# EAGLE board CrackberryPi_1.0.5_test2 (EAGLE 7.2.0)
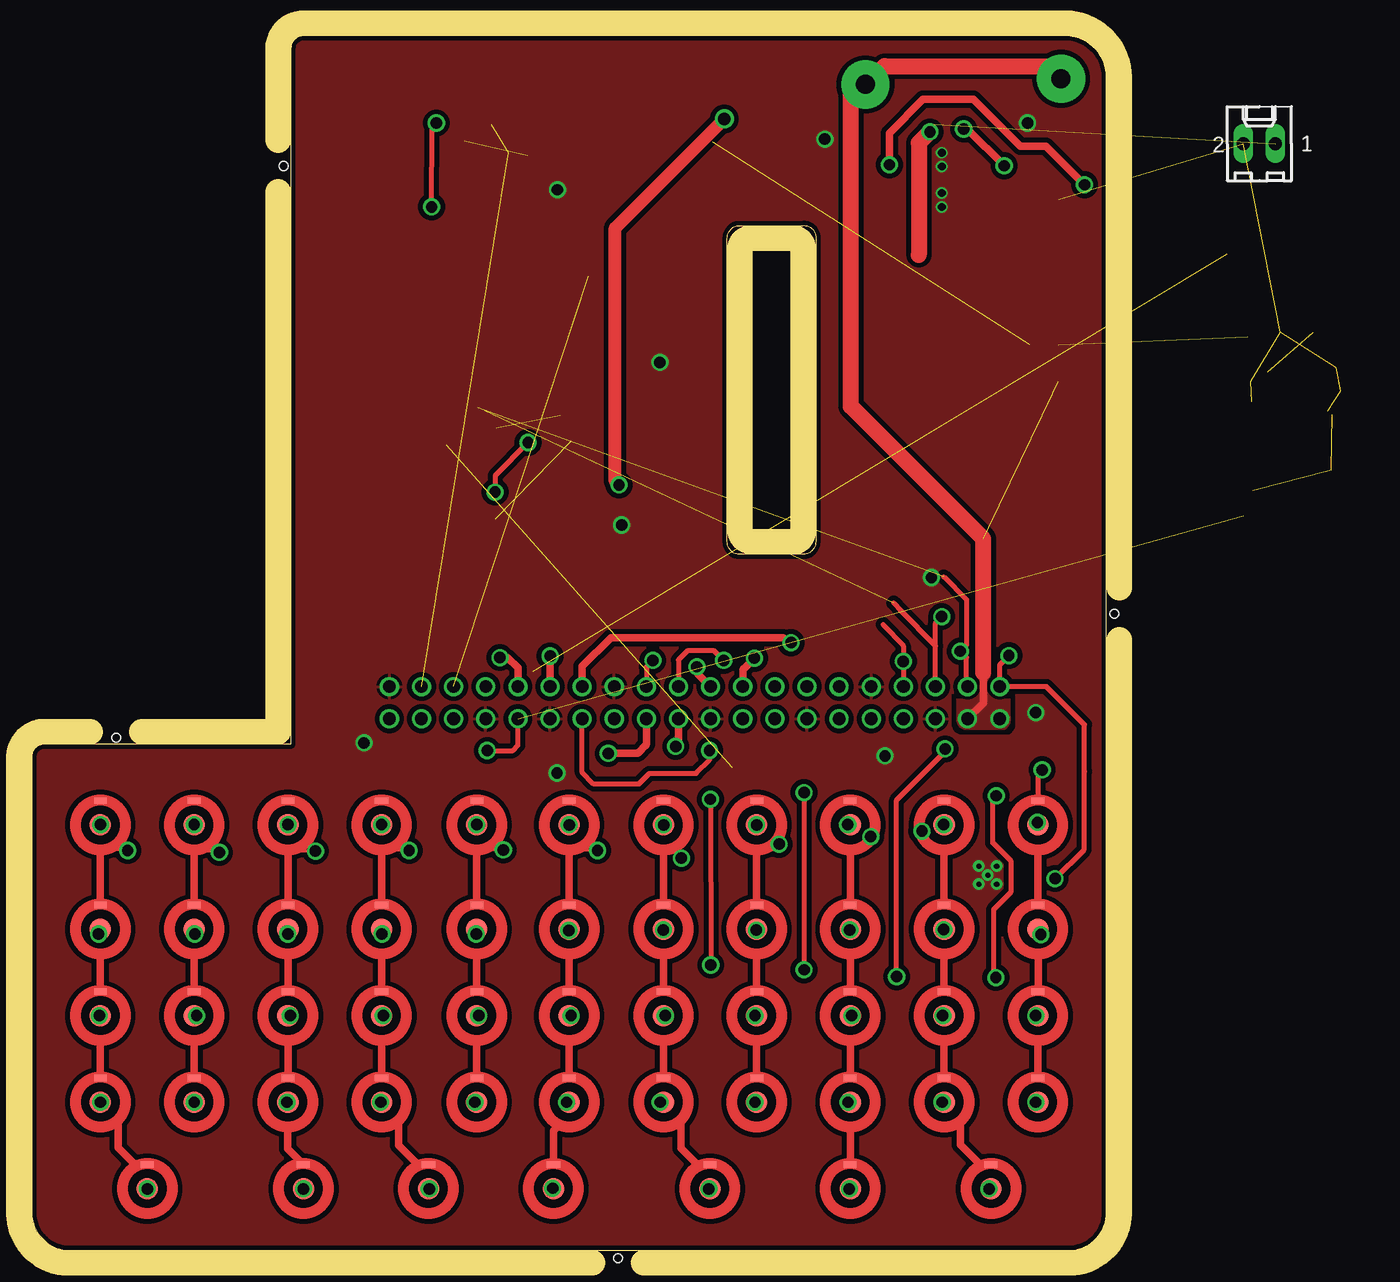
[diagram p0: board, top side]
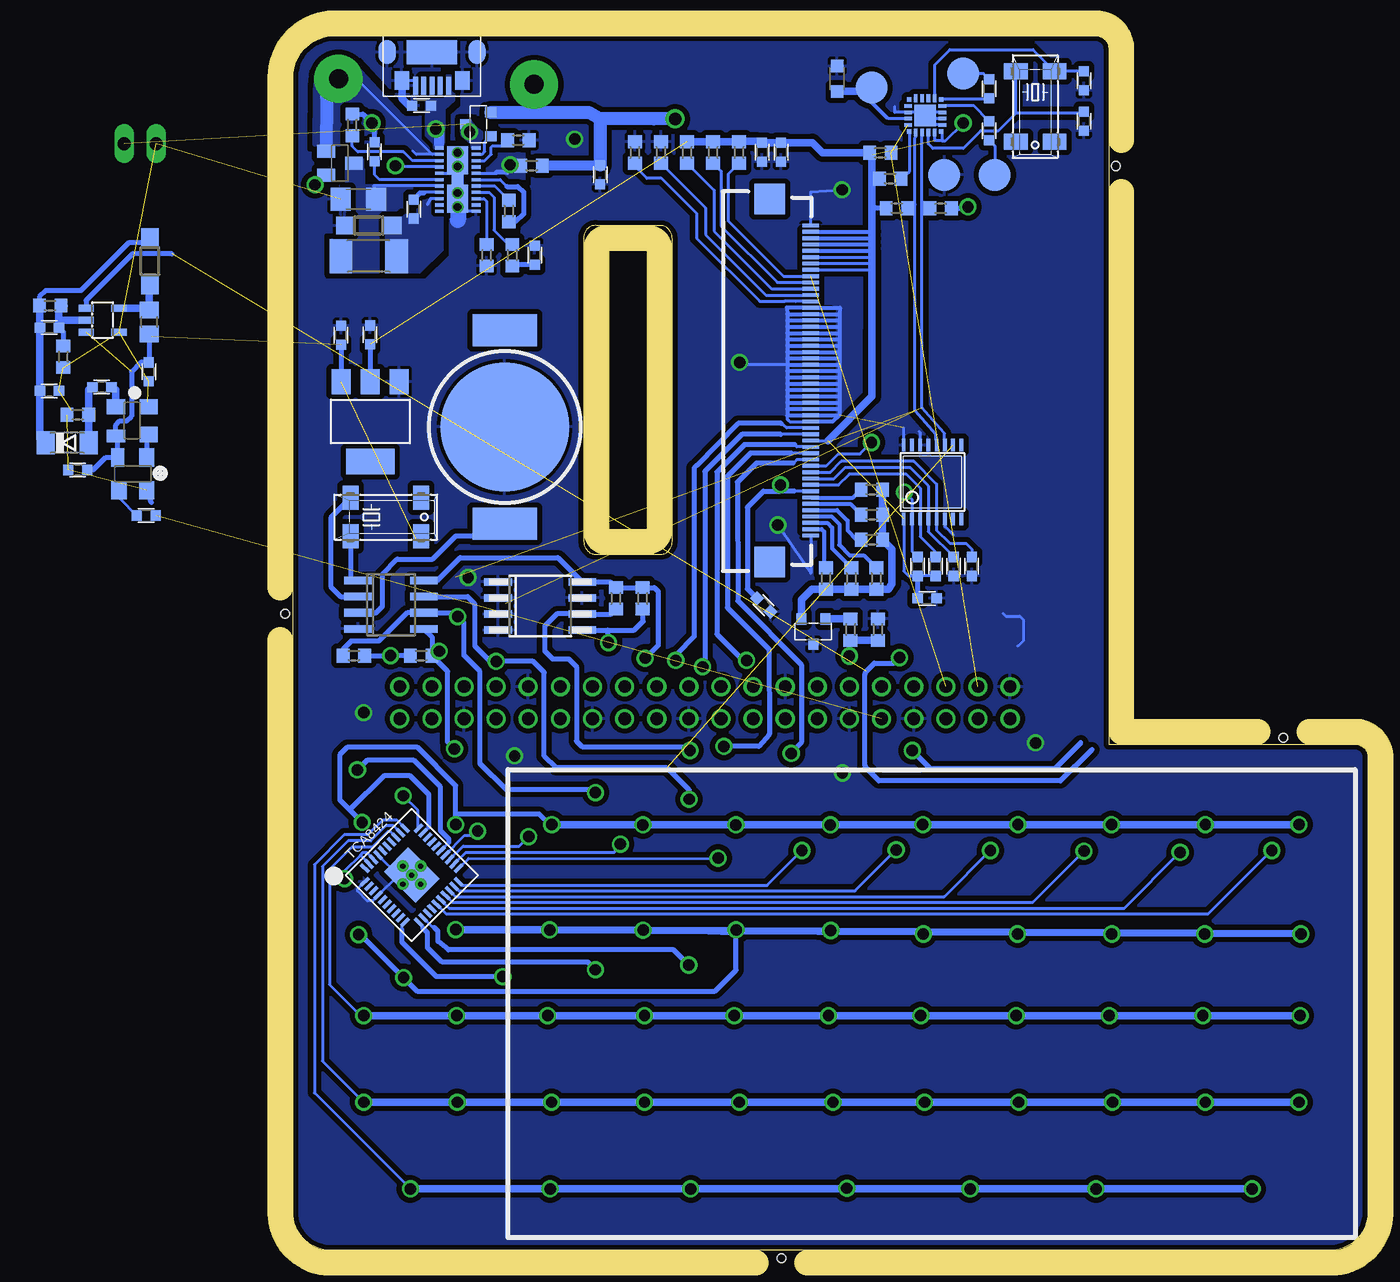
[diagram p1: board, bottom side, seen from below]

Size 85 x 96 mm. Coordinates in mm from the lower left corner, seen from the top.
Outline: 0,39 0,3 arc90 3,0 82,0 arc90 85,3 85,92.7 arc90 81.7,96 21.5,96 arc90 20.5,95 20.5,40 1,40 arc90 0,39
Outline: 56,81 61,81 arc-90 62,80.15 62,56 arc-90 61,55 56,55 arc-90 55,56 55,80 arc-90 56,81
Copper layers (1*16): Top 0.035mm / dielectric 1.5mm / Bottom 0.035mm
Design rules "SeeedStudio_2layer_DRU_no_angle_20140221": minimum track width 6mil, minimum drill 12mil, track to track 6mil, track to pad 6mil, pad to pad 6mil, via to via 6mil, smd to smd 0mil, copper to edge 10mil, drill to drill 10mil, minimum pad ring 10mil, minimum via ring 6mil, stop-mask expansion 2mil, vias tented up to drill 100mil, thermal gap 10mil
Holes 0.7 mm at 19.93,85.7 85.6,50.3 6.67,40.52 46.38,-0.62
bRestrict: area 42.5,73.2 to 45.4,73.3; area 42.5,72.7 to 45.4,72.8; area 42.5,72.2 to 45.4,72.3; area 42.5,71.7 to 45.4,71.8; area 42.5,71.2 to 45.4,71.3; area 42.5,70.7 to 45.4,70.8; area 42.5,70.2 to 45.4,70.3; area 42.5,69.7 to 45.4,69.8; area 42.5,69.2 to 45.4,69.3; area 42.5,68.7 to 45.4,68.8; area 42.5,68.2 to 45.4,68.3; area 42.5,67.7 to 45.4,67.8; area 42.5,67.2 to 45.4,67.3; area 42.5,66.7 to 45.4,66.8; area 42.5,66.2 to 45.4,66.3; area 42.5,65.7 to 45.4,65.8; area 42.5,73.7 to 45.4,73.8; area 33.3,89.7 to 34,89.8; area 33.3,89.2 to 34,89.2; area 42.5,74.2 to 45.4,74.3
Milling: 24 lines

## Footprints (pad centres in the part's own frame; a part is rotated, then mirrored left to right if it is on the bottom)
4MM = smd 1.7 x 1.7: IN 0,0 | smd 1 x 0.5: OUT 0,1.9
B2,54 = smd 2.54 x 2.54: TP 0,0
6410-02 = drill 1.016 long: 1 1.27,0; 2 -1.27,0
C0603 = smd 0.8 x 0.8: 1 -0.75,0; 2 0.75,0
C1206 = smd 1.6 x 1.8: 1 -1.4,0; 2 1.4,0
SOD123 = smd 1.4 x 1.4: A 1.9,0; C -1.9,0
SOD80C = smd 1.4 x 1.8: A 1.7,0; C -1.7,0
SOT223 = smd 1.499 x 2.007: 1 -2.261,-3.15; 2 0.025,-3.15; 3 2.311,-3.15 | smd 3.81 x 2.007: 4 0,3.15
SO-08M = smd 0.6 x 2.2: 1 -1.905,-3.33; 2 -0.635,-3.33; 3 0.635,-3.33; 4 1.905,-3.33; 5 1.905,3.33; 6 0.635,3.33; 7 -0.635,3.33; 8 -1.905,3.33
R0805 = smd 1.3 x 1.5: 1 -0.95,0; 2 0.95,0
R2010 = smd 1.8 x 2.7: 1 -2.2,0; 2 2.2,0
L2012C = smd 1 x 1: 1 -1,0; 2 1,0
MICRO3 = smd 0.8 x 0.9: 1 -0.95,-1; 2 0.95,-1; 3 0,1
MM20SS = smd 1.27 x 1.88: 1 -2.794,-1.524; 2 2.794,-1.524; 3 2.794,1.524; 4 -2.794,1.524
R0603 = smd 1 x 1.1: 1 -0.85,0; 2 0.85,0
SOT23-EBC = smd 1 x 1.4: B 0.95,-1.1; C 0,1.1; E -0.95,-1.1
DFN22 = smd 0.25 x 0.7: 1 -2.5,-1.45; 2 -2,-1.45; 3 -1.5,-1.45; 4 -1,-1.45; 5 -0.5,-1.45; 6 0,-1.45; 7 0.5,-1.45; 8 1,-1.45; 9 1.5,-1.45; 10 2,-1.45; 11 2.5,-1.45; 12 2.5,1.45; 13 2,1.45; 14 1.5,1.45; 15 1,1.45; 16 0.5,1.45; 17 0,1.45; 18 -0.5,1.45; 19 -1,1.45; 20 -1.5,1.45; 21 -2,1.45; 22 -2.5,1.45 | smd 2.2 x 1.65: GND 1.525,0; GND1 -1.5,0 | smd 0.9 x 0.9: P$1 0,0
SOT23-5L = smd 0.55 x 1.2: 1 -0.95,-1.3; 2 0,-1.3; 3 0.95,-1.3; 4 0.95,1.3; 5 -0.95,1.3
SOT143-W = smd 1.2 x 1.45: 1 -1.1,-1.3; 2 -1.1,1.3; 3 1.1,1.3 | smd 1 x 1.45: 4 1.2,-1.3
CR1216 = smd 2.5 x 5.1: + -7.65,0; P$2 7.65,0 | smd 10.2 x 10.2: GND 0,0
SO08 = smd 0.6 x 2.2: 1 -1.905,-2.6; 2 -0.635,-2.6; 3 0.635,-2.6; 4 1.905,-2.6; 5 1.905,2.6; 6 0.635,2.6; 7 -0.635,2.6; 8 -1.905,2.6
TSSOP16 = smd 0.305 x 0.991: 1 -2.275,-2.918; 2 -1.625,-2.918; 3 -0.975,-2.918; 4 -0.325,-2.918; 5 0.325,-2.918; 6 0.975,-2.918; 7 1.625,-2.918; 8 2.275,-2.918; 9 2.275,2.918; 10 1.625,2.918; 11 0.975,2.918; 12 0.325,2.918; 13 -0.325,2.918; 14 -0.975,2.918; 15 -1.625,2.918; 16 -2.275,2.918
QFN40 = smd 0.85 x 0.28: 1 -3,2.25; 2 -3,1.75; 3 -3,1.25; 4 -3,0.75; 5 -3,0.25; 6 -3,-0.25; 7 -3,-0.75; 8 -3,-1.25; 9 -3,-1.75; 10 -3,-2.25; 21 3,-2.25; 22 3,-1.75; 23 3,-1.25; 24 3,-0.75; 25 3,-0.25; 26 3,0.25; 27 3,0.75; 28 3,1.25; 29 3,1.75; 30 3,2.25 | smd 0.28 x 0.85: 11 -2.25,-3; 12 -1.75,-3; 13 -1.25,-3; 14 -0.75,-3; 15 -0.25,-3; 16 0.25,-3; 17 0.75,-3; 18 1.25,-3; 19 1.75,-3; 20 2.25,-3; 31 2.25,3; 32 1.75,3; 33 1.25,3; 34 0.75,3; 35 0.25,3; 36 -0.25,3; 37 -0.75,3; 38 -1.25,3; 39 -1.75,3; 40 -2.25,3 | smd 2.7 x 3.5: P$2 0,0 | smd 1 x 1.5: P$11 -0.65,0.9; P$12 0.65,0.9; P$13 0.65,-0.9; THERMAL -0.65,-0.9 | drill 0.4 pad 0.406: VIA1 0,1; VIA2 -1,0; VIA3 0,0; VIA4 1,0; VIA5 0,-1
QFN20-3X3 = smd 0.34 x 0.34: 1 -1.27,1.27; 6 -1.27,-1.27; 11 1.27,-1.27; 16 1.27,1.27 | smd 0.61 x 0.28: 2 -1.35,0.75; 3 -1.35,0.25; 4 -1.35,-0.25; 5 -1.35,-0.75; 12 1.35,-0.75; 13 1.35,-0.25; 14 1.35,0.25; 15 1.35,0.75 | smd 0.28 x 0.61: 7 -0.75,-1.35; 8 -0.25,-1.35; 9 0.25,-1.35; 10 0.75,-1.35; 17 0.75,1.35; 18 0.25,1.35; 19 -0.25,1.35; 20 -0.75,1.35 | smd 1.7 x 1.7: P$1 0,0
MICRO_USB = smd 0.4 x 1.4: 1_+5V -1.3,2.65; 2_D- -0.65,2.65; 3_D+ 0,2.65; 4_ID 0.65,2.65; 5_0V 1.3,2.65 | smd 4 x 1.9: GND1 0,0 | smd 1.35 x 1.9: GND2 -3.55,0; GND5 3.55,0 | smd 1.15 x 1.45: P$1 -2.4,2.25; P$7 2.4,2.25
20X2 = drill 1: P$1 0,0; P$2 0,2.54; P$3 2.54,0; P$4 2.54,2.54; P$5 5.08,0; P$6 5.08,2.54; P$7 7.62,0; P$8 7.62,2.54; P$9 10.16,0; P$10 10.16,2.54; P$11 12.7,0; P$12 12.7,2.54; P$13 15.24,0; P$14 15.24,2.54; P$15 17.78,0; P$16 17.78,2.54; P$17 20.32,0; P$18 20.32,2.54; P$19 22.86,0; P$20 22.86,2.54; P$21 25.4,0; P$22 25.4,2.54; P$23 27.94,0; P$24 27.94,2.54; P$25 30.48,0; P$26 30.48,2.54; P$27 33.02,0; P$28 33.02,2.54; P$29 35.56,0; P$30 35.56,2.54; P$31 38.1,0; P$32 38.1,2.54; P$33 40.64,0; P$34 40.64,2.54; P$35 43.18,0; P$36 43.18,2.54; P$37 45.72,0; P$38 45.72,2.54; P$39 48.26,0; P$40 48.26,2.54
FH12-50S-0.5SH = smd 1.3 x 0.3: 1 3.95,27.8; 2 3.95,27.3; 3 3.95,26.8; 4 3.95,26.3; 5 3.95,25.8; 6 3.95,25.3; 7 3.95,24.8; 8 3.95,24.3; 9 3.95,23.8; 10 3.95,23.3; 11 3.95,22.8; 12 3.95,22.3; 13 3.95,21.8; 14 3.95,21.3; 15 3.95,20.8; 16 3.95,20.3; 17 3.95,19.8; 18 3.95,19.3; 19 3.95,18.8; 20 3.95,18.3; 21 3.95,17.8; 22 3.95,17.3; 23 3.95,16.8; 24 3.95,16.3; 25 3.95,15.8; 26 3.95,15.3; 27 3.95,14.8; 28 3.95,14.3; 29 3.95,13.8; 30 3.95,13.3; 31 3.95,12.8; 32 3.95,12.3; 33 3.95,11.8; 34 3.95,11.3; 35 3.95,10.8; 36 3.95,10.3; 37 3.95,9.8; 38 3.95,9.3; 39 3.95,8.8; 40 3.95,8.3; 41 3.95,7.8; 42 3.95,7.3; 43 3.95,6.8; 44 3.95,6.3; 45 3.95,5.8; 46 3.95,5.3; 47 3.95,4.8; 48 3.95,4.3; 49 3.95,3.8; 50 3.95,3.3 | smd 2.4 x 2.4: P$1 0.7,1.2; P$2 0.7,29.9

## Placement (x,y rotation side)
0  DOME  [4MM]  72.16,33.63 0 top
1  DOME  [4MM]  5.43,33.63 0 top
2  DOME  [4MM]  12.86,33.63 0 top
3  DOME  [4MM]  20.27,33.63 0 top
4  DOME  [4MM]  27.68,33.63 0 top
5  DOME  [4MM]  35.2,33.63 0 top
6  DOME  [4MM]  42.51,33.63 0 top
7  DOME  [4MM]  49.97,33.63 0 top
8  DOME  [4MM]  57.33,33.63 0 top
9  DOME  [4MM]  64.73,33.63 0 top
!  DOME  [4MM]  64.73,11.71 0 top
(  DOME  [4MM]  72.16,18.55 0 top
)  DOME  [4MM]  79.56,18.55 0 top
+  DOME  [4MM]  79.56,25.39 0 top
,  DOME  [4MM]  72.16,11.71 0 top
-  DOME  [4MM]  79.56,33.63 0 top
.  DOME  [4MM]  79.56,11.71 0 top
?  DOME  [4MM]  57.33,11.71 0 top
@  DOME  [4MM]  64.73,4.87 0 top
A  DOME  [4MM]  5.43,18.55 0 top
AUDIO_L  TPB2,54  [B2,54]  32,93 0 bottom
AUDIO_R  TPB2,54  [B2,54]  29.5,85 0 bottom
B  DOME  [4MM]  35.2,11.71 0 top
BATTERY  22-27-2021-02  [6410-02]  97.08,87.47 0 top  (outside the outline)
C  DOME  [4MM]  20.27,11.71 0 top
C2  [C0603]  35.6,54.05 90 bottom
C3  [C0603]  34.17,54.05 90 bottom
C4  [C0603]  31.32,54.05 90 bottom
C5  4.7mF  [C0603]  74.83,90.47 180 bottom
C6  10mf  [C0603]  96.4,69.42 270 bottom  (outside the outline)
C7  [C0603]  34.85,51.52 0 bottom
C8  20pF  [C0603]  22.45,89.25 270 bottom
C9  1mf  [C0603]  47.77,51 315 bottom
C10  .1mF  [C0603]  78.55,86.83 270 bottom
C11  270pF  [C0603]  65.88,78.65 270 bottom
C12  0.47mF  [C0603]  75.45,82.3 270 bottom
C13  4.7mF  [C0603]  81.2,72.33 90 bottom
C14  4.7mF  [C0603]  78.9,72.35 90 bottom
C15  22uF  [C1206]  79.83,83.08 0 bottom
C16  4.7mF  [C0603]  60.7,85.03 270 bottom
C18  [C0603]  32.75,54.05 90 bottom
C19  4.7mf  [C0603]  104.25,67.92 0 bottom  (outside the outline)
C20  68pf  [C0603]  104.25,72.92 0 bottom  (outside the outline)
C21  470pf  [C0603]  100.1,68.22 0 bottom  (outside the outline)
C22  0.1mf  [C0603]  102.03,61.67 0 bottom  (outside the outline)
C23  470pf  [C0603]  96.6,58.08 180 bottom  (outside the outline)
C24  20pF  [C0603]  22.45,92.45 90 bottom
C25  0.47uF  [C0603]  29.95,91.8 270 bottom
C26  0.47uF  [C0603]  29.95,88.5 90 bottom
C27  10uF  [C0603]  47.9,86.8 270 bottom
C28  22nF  [C0603]  46.4,86.8 270 bottom
D  DOME  [4MM]  20.27,18.55 0 top
D1  [SOD123]  96.3,78.17 270 bottom  (outside the outline)
D2  [SOD123]  79,81 180 bottom
D4  1N759  [SOD80C]  102.85,63.83 0 bottom  (outside the outline)
E  DOME  [4MM]  20.27,25.39 0 top
F  DOME  [4MM]  27.68,18.55 0 top
FN-RIGHT  DOME  [4MM]  75.86,4.87 0 top
G  DOME  [4MM]  35.2,18.55 0 top
GND  TPB2,54  [B2,54]  33.5,85 0 bottom
H  DOME  [4MM]  42.51,18.55 0 top
I  DOME  [4MM]  57.33,25.39 0 top
IC1  REG1117  [SOT223]  78.88,65.5 180 bottom
IC2  24C02CSM  [SO-08M]  65.45,50.92 270 bottom
J  DOME  [4MM]  49.97,18.55 0 top
K  DOME  [4MM]  57.33,18.55 0 top
L  DOME  [4MM]  64.73,18.55 0 top
L1  8.2mH  [R0805]  96.35,73.38 90 bottom  (outside the outline)
L2  6.8uH  [R2010]  79,78.58 180 bottom
L3  120nH  [L2012C]  41.98,92.6 270 bottom
M  DOME  [4MM]  49.97,11.71 0 top
N  DOME  [4MM]  42.51,11.71 0 top
O  DOME  [4MM]  64.73,25.39 0 top
P  DOME  [4MM]  72.16,25.39 0 top
Q  DOME  [4MM]  5.43,25.39 0 top
Q1  IRLML5203  [MICRO3]  43.85,48.9 180 bottom
Q2  32.768  [MM20SS]  26.3,90.4 270 bottom
Q3  [MM20SS]  77.65,57.95 0 bottom
Q4  IRLML5203  [MICRO3]  70.35,89 90 bottom
R  DOME  [4MM]  27.68,25.39 0 top
R1  10k  [R0603]  80.17,47 0 bottom
R2  10k  [R0603]  33.77,82.35 0 bottom
R3  10k  [R0603]  74.85,47 180 bottom
R4  3.9K  [R0603]  59.45,51.52 90 bottom
R5  3.9K  [R0603]  57.35,51.52 90 bottom
R6  10k  [R0603]  37.25,82.38 180 bottom
R7  59k  [R0603]  67.65,78.65 270 bottom
R8  2.1k  [R0603]  80.3,88.95 90 bottom
R9  71.5k  [R0603]  67.17,87.75 0 bottom
R10  40.2k  [R0603]  69.67,78.65 270 bottom
R11  10k  [R0603]  38.55,86.75 0 bottom
R13  10k  [R0603]  49.73,86.78 90 bottom
R14  10k  [R0603]  51.77,86.78 90 bottom
R15  10k  [R0603]  53.83,86.78 90 bottom
R16  10k  [R0603]  55.9,86.78 270 bottom
R17  10k  [R0603]  57.95,86.78 270 bottom
R18  147  [R0603]  39.23,60.12 180 bottom
R19  147  [R0603]  39.23,58.15 180 bottom
R20  147  [R0603]  39.23,56.17 180 bottom
R21  147  [R0603]  38.88,53.1 90 bottom
R22  147  [R0603]  40.85,53.1 90 bottom
R23  147  [R0603]  42.85,53.1 90 bottom
R24  10k  [R0603]  40.9,49.05 270 bottom
R25  45k  [R0603]  38.75,49.05 270 bottom
R26  10k  [R0603]  67.92,82.15 90 bottom
R27  1k  [R0603]  66.12,85.72 0 bottom
R29  10k  [R0603]  37.77,84.7 0 bottom
R36  1.3m  [R0603]  104.2,74.67 180 bottom  (outside the outline)
R37  110k  [R0603]  103.15,70.62 90 bottom  (outside the outline)
R38  30  [R0603]  102,66.03 0 bottom  (outside the outline)
S  DOME  [4MM]  12.86,18.55 0 top
SHIFT-RIGHT  DOME  [4MM]  53.62,4.87 0 top
SHILFT-LEFT  DOME  [4MM]  9.14,4.87 0 top
SPACE1  DOME  [4MM]  21.5,4.87 0 top
SPACE2  DOME  [4MM]  31.39,4.87 0 top
SPACE3  DOME  [4MM]  41.27,4.87 0 top
T  DOME  [4MM]  35.2,25.39 0 top
T2  [SOT23-EBC]  81.28,85.92 270 bottom
TP1  TPB2,54  [B2,54]  39.25,91.9 0 bottom
U  DOME  [4MM]  49.97,25.39 0 top
U$1  LTC4090  [DFN22]  71.97,84.62 90 bottom
U$2  NCP1406  [SOT23-5L]  100.05,73.53 270 bottom  (outside the outline)
U$3  MAX2650  [SOT143-W]  97.7,65.58 270 bottom  (outside the outline)
U$4  CR1216  [CR1216]  68.25,65.08 90 bottom
U$5  MCP7940N  [SO08]  77.25,51.02 270 bottom
U$6  TSC2007  [TSSOP16]  34.42,60.73 0 bottom
U$7  TCA8424  [QFN40]  75.6,29.65 45 bottom
U$8  SI4713  [QFN20-3X3]  35,89.7 0 bottom
U$9  MICRO_USB  [MICRO_USB]  74,94.7 180 bottom
U$10  MAX2650  [SOT143-W]  97.65,61.38 180 bottom  (outside the outline)
U$11  HEADER  [20X2]  76.55,44.55 180 top
V  DOME  [4MM]  27.68,11.71 0 top
W  DOME  [4MM]  12.86,25.39 0 top
X  DOME  [4MM]  12.86,11.71 0 top
X5  FH12-50S-0.5SH  [FH12-50S-0.5SH]  48,53.2 0 bottom
Y  DOME  [4MM]  42.51,25.39 0 top
Z  DOME  [4MM]  5.43,11.71 0 top

## Library data of the parts
0 1-9 ! ( ) + , - . ? @ A B C D E F FN-RIGHT G H I J K L M N O P Q R S SHIFT-RIGHT SHILFT-LEFT SPACE1-SPACE3 T U V W X Y Z = DOME
AUDIO_L AUDIO_R GND TP1 = testpad
BATTERY = con-molex; OC_FARNELL: unknown; OC_NEWARK: unknown
C2-C16 C18-C28 L1-L3 R1-R11 R13-R27 R29 R36-R38 = rcl
D1 D2 D4 = diode
IC1 = burr-brown; MPN: REG1117; OC_FARNELL: 1097566; OC_NEWARK: 14P6981
IC2 = microchip; MF: MICROCHIP; MPN: 24C02C-I/SN; OC_FARNELL: 1084339; OC_NEWARK: 96K4063
Q1 Q4 = transistor-power
Q2 Q3 = crystal; OC_FARNELL: unknown; OC_NEWARK: unknown
T2 = transistor
U$1 = LTC4090
U$2 = ncp1406
U$3 U$10 = max2650
U$4 = cr1216
U$5 = MCP7940N
U$6 = tsc2046
U$7 = TCA8424
U$8 = Si4713
U$9 = MICRO_USB
U$11 = 20x2_cirqoid
X5 = FCI_62684; MPN: FH12-50S-0.5SH(55); OC_FARNELL: 1324557; OC_NEWARK: 34M6181

## Nets
+3V3: C2.1 C3.1 C7.1 C14.1 C27.1 C28.1 IC1.2 R2.2 R6.2 R11.1 R13.2 R14.2 R15.2 R29.1 U$6.1 U$8.10 U$8.11 X5.2 X5.3 X5.4 X5.5 X5.6 X5.7 X5.8 X5.35
+5V: C6.1 C9.1 C13.1 C16.1 C22.2 IC1.3 L1.1 Q4.2 R27.2 T2.E U$1.13 U$2.3 U$3.4 U$10.4 U$11.P$2 U$11.P$4 X5.43
+15V: C19.1 C20.1 D1.C D4.C R36.2
AUDIO_L: AUDIO_L.TP C25.1
AUDIO_R: AUDIO_R.TP C26.1
AVALANCHE_ENABLE: U$11.P$40
BACKLIGHT: U$7.9
BAT: BATTERY.1 Q4.3 U$1.11
BOOST: C12.1 U$1.19
CE0: U$11.P$24 X5.38
CE1: U$11.P$26
COL0: 0.IN 1.IN 2.IN 3.IN 4.IN 5.IN 6.IN 7.IN 8.IN 9.IN -.IN U$7.29
COL1: +.IN E.IN I.IN O.IN P.IN Q.IN R.IN T.IN U$7.30 U.IN W.IN Y.IN
COL2: @.IN FN-RIGHT.IN SHIFT-RIGHT.IN SHILFT-LEFT.IN SPACE1.IN SPACE2.IN SPACE3.IN U$7.31
COL3: !.IN ,.IN ..IN ?.IN B.IN C.IN M.IN N.IN U$7.32 V.IN X.IN Z.IN
COL4: (.IN ).IN A.IN D.IN F.IN G.IN H.IN J.IN K.IN L.IN S.IN U$7.33
COL5: U$7.34
COL6: U$7.35
COL7: U$7.36
D+: U$9.3_D+
D-: U$9.2_D-
D/C: U$11.P$22 X5.37
DE: R17.2 X5.13
DISPLAY_RESET: R13.1 U$11.P$35 X5.9
FB: C20.2 R36.1 R37.2 U$2.2
FM_RST: R11.2 U$8.5 U$11.P$37
GND: BATTERY.2 C4.1 C5.2 C6.2 C7.2 C8.2 C9.2 C10.1 C11.1 C13.2 C14.2 C15.1 C16.2 C18.1 C19.2 C22.1 C24.1 C27.2 C28.2 D2.A GND.TP IC1.1 IC2.1 IC2.2 IC2.3 IC2.4 IC2.7 L3.1 Q1.3 R8.2 R9.2 R10.2 R16.1 R17.1 R25.1 R37.1 R38.1 U$1.1 U$1.16 U$1.GND U$2.4 U$3.2 U$4.GND U$5.4 U$6.6 U$6.13 U$6.14 U$6.16 U$7.1 U$7.4 U$7.37 U$7.THERMAL U$7.VIA1 U$7.VIA2 U$7.VIA3 U$7.VIA4 U$7.VIA5 U$8.3 U$8.12 U$8.13 U$8.14 U$8.P$1 U$9.5_0V U$9.GND1 U$9.GND2 U$9.GND5 U$9.P$1 U$9.P$7 U$10.2 U$11.P$6 U$11.P$9 U$11.P$14 U$11.P$20 U$11.P$25 U$11.P$30 U$11.P$34 U$11.P$39 X5.1 X5.14 X5.15 X5.16 X5.17 X5.18 X5.19 X5.20 X5.21 X5.22 X5.23 X5.24 X5.25 X5.26 X5.27 X5.28 X5.29 X5.30 X5.31 X5.32 X5.50
GPIO16: U$11.P$36
GPIO18: U$11.P$12
GPIO20: U$11.P$38
GPIO22: U$11.P$15
GPIO23: U$11.P$16
GPIO24: U$11.P$18
GPIO27: U$11.P$13
GPO1: U$8.19
GPO2: U$8.18
H_SYNC: R15.1 X5.11
HVOUT: C15.2 L2.2 T2.C U$1.18
HVPR: R27.1 T2.B U$1.7
ID_SC: IC2.6 R4.1 U$11.P$28
ID_SD: IC2.5 R5.1 U$11.P$27
IN: C5.1 U$1.12 U$1.15 U$9.1_+5V
IN_1: C21.2 U$3.1
INT: U$5.7 U$6.10 U$7.12 U$11.P$7
IR_RX: U$11.P$11
IR_TX: U$11.P$33
LEDK1: R18.2 X5.44
LEDK2: R19.2 X5.45
LEDK3: R20.2 X5.46
LEDK4: R21.2 X5.47
LEDK5: R22.2 X5.48
LEDK6: R23.2 X5.49
LX: D1.A L1.2 U$2.5
MISO: U$11.P$21 X5.33
MOSI: U$11.P$19 X5.34
N$1: C24.2 Q2.4 U$8.17
N$3: R9.1 U$1.9
N$4: R10.1 U$1.3
N$5: R8.1 U$1.14
N$6: R7.1 U$1.4
N$7: C10.2 U$1.17
N$8: C11.2 R7.2
N$10: U$7.6
N$11: Q3.1 U$5.1
N$12: Q1.2 R18.1 R19.1 R20.1 R21.1 R22.1 R23.1
N$13: Q3.4 U$5.2
N$14: U$7.7
N$16: C21.1 D4.A R38.2
N$18: U$7.8
N$19: C8.1 Q2.1 U$8.9
N$20: Q1.1 R24.1
N$21: R26.1 U$1.6
N$22: C25.2 U$8.16
N$23: C26.2 U$8.15
N$25: L3.2 TP1.TP U$8.4
N$26: R29.2 U$8.6
N$27: R26.2 U$1.5
N$33: Q4.1 U$1.10
OUT1_IN2: U$3.3 U$10.1
OUT2: C23.2 U$10.3
P_CLK: R16.2 X5.12
PWM: R24.2 R25.2 U$11.P$29
RANDOM: C23.1 U$11.P$32
ROW0: 1.OUT A.OUT Q.OUT SHILFT-LEFT.OUT U$7.15 Z.OUT
ROW1: 2.OUT S.OUT U$7.16 W.OUT X.OUT
ROW2: 3.OUT C.OUT D.OUT E.OUT SPACE1.OUT U$7.17
ROW3: 4.OUT F.OUT R.OUT SPACE2.OUT U$7.18 V.OUT
ROW4: 5.OUT B.OUT G.OUT T.OUT U$7.19
ROW5: 6.OUT H.OUT N.OUT SPACE3.OUT U$7.20 Y.OUT
ROW6: 7.OUT J.OUT M.OUT SHIFT-RIGHT.OUT U$7.21 U.OUT
ROW7: 8.OUT ?.OUT I.OUT K.OUT U$7.22
ROW8: 9.OUT !.OUT @.OUT L.OUT O.OUT U$7.23
ROW9: 0.OUT (.OUT ,.OUT FN-RIGHT.OUT P.OUT U$7.24
ROW10: ).OUT +.OUT -.OUT ..OUT U$7.25
ROW11: U$7.26
ROW12: U$7.27
ROW13: U$7.28
ROW14: U$7.40
ROW15: U$7.3
SCK: U$11.P$23 X5.36
SCL_3V3: R1.1 R6.1 U$5.6 U$6.12 U$7.11 U$8.7 U$11.P$5
SDA_3V3: R2.1 R3.1 U$5.5 U$6.11 U$7.10 U$8.8 U$11.P$3
STEPUP_ENABLE: U$2.1 U$11.P$31
SW: C12.2 D2.C L2.1 U$1.20
TOUCH_X+: C2.2 U$6.2 X5.39
TOUCH_X-: C18.2 U$6.4 X5.41
TOUCH_Y+: C3.2 U$6.3 X5.42
TOUCH_Y-: C4.2 U$6.5 X5.40
UART_RX: U$11.P$10
UART_TX: U$11.P$8
V+: IC2.8 R4.2 R5.2 U$5.8 U$11.P$17
V_SYNC: R14.1 X5.10
VBAT+: U$4.+ U$5.3
VCC: R1.2 R3.2 U$7.38 U$7.39 U$11.P$1

## Tracks (layer width: path | path; a pad name or v marks a point on that pad's centre or on a via)
+3V3  (via drill 0.9)  (3 unrouted)
  Top 0.406: v31.62,82.47 31.65,88.75 v32,89.1
  Bottom 0.254: U$8.11 33.7,88.4 33.7,87.7 | 33.7,87.7 34.25,87.7 U$8.10 | 33.7,87.7 33.4,87.7 v32,89.1 | X5.35 42.7,64 | 39.2,79.42 39.27,79.5 | R29.1 39.17,84.65 | X5.3 44.02,79.97 39.2,79.97 | C3.1 C2.1 36.33,53.3 36.7,53.67 U$6.1 | 39.23,79 39.23,78.95 39.2,78.92 | X5.6 39.33,78.5 39.2,78.38 | X5.7 39.3,78 39.2,78.1 | X5.8 39.25,77.5 39.2,77.55
  Bottom 0.305: X5.5 39.23,79 | X5.2 39.23,80.5 39.2,80.53 | X5.3 39.3,80 | X5.4 39.27,79.5
  Bottom 0.406: 39.33,72.65 39.33,67.38 42.7,64 | C14.1 78.9,69.4 IC1.2 | C2.1 C7.1 | R6.2 38.92,82.38 39.2,82.65 | R2.2 31.68,82.35 v31.62,82.47
  Bottom 0.61: R15.2 R14.2 R13.2 49.65,87.65 48.2,87.65 C27.1 C28.1 43.92,87.55 43.12,86.75 R11.1 39.2,86.55 39.2,84.75 | 39.2,84.75 39.2,82.65 39.2,80.53 39.2,79.97 39.2,79.42 39.2,78.92 39.2,78.38 39.2,78.1 39.2,77.55 39.2,67.5 42.7,64 | 39.17,84.65 38.7,84.65 38.58,84.78 39.17,84.78 39.2,84.75
+5V  (via drill 0.9, 1, 1.5 pad 3.81)  (3 unrouted)
  Top 0.61: U$11.P$4 75.25,43.25 75.25,45.67
  Top 1.016: v54.77,89.42 46.15,80.8 46.15,60.8 v46.45,60.5 | 65.92,92.1 v65.92,92.15
  Top 1.27: 65.92,92.1 67.45,93.6 80.53,93.6 v81.4,92.6 | 75.25,45.67 75.25,56.23 64.78,66.7 64.8,91.38 v65.92,92.15
  Bottom 0.254: U$11.P$2 76.55,42.05 | X5.43 45.35,60 | 75.53,86.9 75.25,86.62 U$1.13 73.97,86.62 79.95,92.6 v81.4,92.6
  Bottom 0.406: U$10.4 99.05,62.67 | 45.35,60 46.45,60 | 46.45,60 v46.45,60.5 | U$10.4 98.85,64.22 U$3.4 99,65.22 98.67,65.55 98.15,65.55 97.75,65.92 97.75,69.45 97.03,70.17 C6.1 96.35,70.22 L1.1 | C22.2 100.8,61.67 99.8,62.67 U$10.4 | C9.1 49.08,52.27 49.08,58.73 47.8,60 46.45,60 | 56.55,89.53 56.45,89.42 | C13.1 81.2,69.41 IC1.3
  Bottom 0.61: 96.15,72.22 L1.1
  Bottom 0.813: C16.1 R27.2
  Bottom 1.016: v54.77,89.42 56.45,89.42 60.7,89.42 | 65.92,89.95 61.6,89.95 60.7,89.42 | 60.7,89.42 C16.1 | Q4.2 65.92,89.95 | 65.92,89.95 v65.92,92.15 | v81.4,92.6 82.35,91.15 T2.E
  pour Bottom (isolate 0.406, no thermals): 73.08,86.38 76.5,86.38 78.25,86.35 78.28,87.35 83.33,87.35 83.3,91.72 83.15,92.88 80.1,93.8 76.4,89.75 74.92,89.7 74.92,87.8 74,86.88 73.08,86.88
  pour Top (isolate 0.254, no thermals): 73.4,43.98 73.41,41.96 arc91 73.94,41.4 76.88,41.4 77.12,41.75 77.12,44.55 75.9,44.73 75.6,44.95 75.6,45.58 74.9,45.58 74.9,44.33
+15V
  Bottom 0.406: R36.2 105.05,75.35 104.55,75.85 101.78,75.85 98,79.62 96.75,79.62 D1.C
  Bottom 0.61: D4.C 105,64.12 C19.1 C20.1 105,74.38 R36.2
AUDIO_L
  Bottom 0.254: C25.1 30.4,93 AUDIO_L.TP
AUDIO_R
  Bottom 0.254: 29.05,85.45 AUDIO_R.TP 29.5,87.3 C26.1
BAT  (via drill 0.9)  (1 unrouted)
  Top 1.27: v71.03,88.4 70.15,87.53 70.15,78.67
  Bottom 0.254: v71.03,88.4 70.85,88.5 Q4.3
  pour Bottom (no thermals): 70.83,87.12 70.83,87.45 71.62,88.15 71.65,88.55 71.62,89.28 70.97,89.3 70.5,88.7 69.83,88.22 69.8,87.2 69.92,87.12
BOOST
  Bottom 0.254: U$1.19 74.62,83.62 74.65,83.55
  Bottom 0.406: 74.65,83.55 74.97,83.55 C12.1
CE0  (via drill 0.9)
  Top 0.61: U$11.P$24 48.61,40.09 arc-45 48.52,39.87 48.02,39.37 arc-45 47.79,39.27 v45.6,39.27
  Bottom 0.254: X5.38 45.15,62.5 45.42,62.23
  Bottom 0.406: 45.42,62.23 48.35,62.23 49.85,60.73 49.83,51.33 44.8,46.27 44.8,40.15 v45.6,39.27
COL0  (via drill 0.9)
  Top 0.254: 1.IN 5.73,33.63 v5.45,33.65 | v12.85,33.65 12.84,33.65 2.IN | 3.IN 20.02,33.63 v20.27,33.65 | 4.IN 27.42,33.63 v27.68,33.65 | 5.IN 34.97,33.63 v35.2,33.65 | 6.IN 42.27,33.63 v42.5,33.62 | 7.IN 49.67,33.63 v49.98,33.62 | 8.IN 57.18,33.63 v57.33,33.62 | 9.IN 64.52,33.63 v64.53,33.65 | v72.12,33.65 71.92,33.63 0.IN | -.IN 80.27,33.63 v79.53,33.83
  Bottom 0.254: v12.85,33.65 v20.27,33.65 20.02,33.63 3.IN 20.29,33.65 v27.68,33.65 27.42,33.63 4.IN 27.7,33.65 v35.2,33.65 v42.5,33.62 42.27,33.63 6.IN 42.52,33.65 v49.98,33.62 49.7,33.6 v57.33,33.62 57.18,33.63 8.IN 57.34,33.65 v64.53,33.65 64.52,33.63 64.69,33.63 | U$7.29 74.25,33.48
  Bottom 0.406: 64.69,33.63 65.53,34.48 72.12,34.48 v72.12,33.65 72.12,36.73 75.15,39.75 80.7,39.75 81.3,39.15 81.3,35.6 80.5,34.8 | 79.7,34 v79.53,33.83 80.5,34.8 | 74.25,33.48 74.25,36.02 75.72,37.5 77.8,37.5 80.5,34.8
  Bottom 0.61: v5.45,33.65 v64.53,33.65
COL1  (via drill 0.9)
  Top 0.254: Q.IN 5.6,25.39 v5.3,25 | v12.9,25 W.IN | E.IN 20.3,24.99 20.3,25.05 | 27.55,25.39 R.IN 27.7,25.02 v27.7,25 | 27.55,25.39 v27.7,25 | T.IN 35.05,25.39 v35.15,25 | Y.IN 42.35,25.39 v42.48,25.27 | U.IN 49.8,25.39 v49.95,25.32 | I.IN 57.16,25.39 v57.3,25.3 | O.IN 64.59,25.39 v64.7,25.32 | P.IN 72.01,25.39 v72.12,25.35 | +.IN 80.3,25.39 v79.8,24.95 | 20.1,25 v20.25,25 | v20.25,25 20.3,25.05 | 20.3,25.05 20.35,25 v20.25,25 | 27.55,25.39 27.6,25.34 27.6,25 v27.7,25
  Top 0.406: v76.25,21.55 76.05,21.75 76.05,26.93 77.42,28.3 77.42,30.77 76,32.2 76,35.65 v76.28,35.92
  Bottom 0.254: W.IN v12.9,25 v27.7,25 | v27.7,25 v35.15,25 35.05,25.39 T.IN 35.2,25 v42.48,25.27 42.35,24.99 42.51,24.99 42.66,25 v49.95,25.32 49.94,25.04 50.06,25.04 50.17,25 v57.3,25.3 v64.7,25.32 | U$7.30 75.12,33.32 75.12,34.77 v76.28,35.92 | v20.25,25 v27.7,25
  Bottom 0.406: v49.95,25.32 49.95,22.15 51.62,20.48 75.17,20.48 v76.25,21.55 79.65,24.95 v79.8,24.95
  Bottom 0.61: v5.3,25 v64.7,25.32 arc-90 64.72,25.35 v72.12,25.35
COL2  (via drill 0.9)
  Top 0.254: SHILFT-LEFT.IN 9.28,4.87 arc-90 v9.15,4.85 | v21.5,4.85 21.52,4.85 SPACE1.IN | SPACE2.IN 31.27,4.87 v31.45,4.85 | SPACE3.IN 41.23,4.87 v41.2,4.9 | SHIFT-RIGHT.IN 53.57,4.87 v53.55,4.85 | @.IN 64.67,4.87 v64.65,4.85 | FN-RIGHT.IN 75.72,4.87 v75.7,4.85
  Bottom 0.254: v75.7,4.85 v64.65,4.85 v53.55,4.85 41.25,4.85 v41.2,4.9 31.41,4.9 SPACE2.IN 31.43,4.87 v31.45,4.85 v21.5,4.85 | U$7.31 76.77,34 77.9,34 79.1,32.83 80.95,32.83 83.3,30.48 83.3,12.45 v75.7,4.85 | FN-RIGHT.IN 75.72,4.87 v75.7,4.85
  Bottom 0.61: v9.15,4.85 v75.7,4.85
COL3  (via drill 0.9)
  Top 0.254: Z.IN 5.25,11.7 v5.45,11.7 | v12.85,11.7 13.49,11.71 X.IN | C.IN 20.25,11.7 v20.2,11.7 | V.IN 27.66,11.7 v27.6,11.7 | B.IN 35.19,11.7 v35.05,11.7 | N.IN 42.49,11.7 v42.3,11.7 | M.IN 49.95,11.7 v49.7,11.7 | ?.IN v57.2,11.71 v57.2,11.7 | !.IN v64.55,11.71 v64.55,11.7 | ,.IN v72,11.71 v72,11.7 | ..IN v79.4,11.71 v79.4,11.7
  Bottom 0.254: v49.7,11.7 v49.69,11.71 49.15,11.71 | 49.15,11.71 N.IN 42.49,11.7 v42.3,11.7 v35.05,11.7 v35.04,11.71 V.IN 27.66,11.7 v27.6,11.7 v27.59,11.71 C.IN 20.25,11.7 v20.2,11.7 v12.85,11.7 | v57.2,11.7 49.15,11.7 49.15,11.71 | v64.55,11.7 v72,11.7 v79.4,11.7 | U$7.32 77.03,33.55 77.65,33.55 78.85,32.35 80.65,32.35 82.65,30.35 82.65,14.95 v79.4,11.7 | ..IN v79.41,11.71 v79.4,11.7
  Bottom 0.61: v64.55,11.7 v57.2,11.7 | v5.45,11.7 v79.4,11.7
COL4  (via drill 0.9)
  Top 0.254: ).IN v79.4,18.55 | v72.05,18.55 (.IN | L.IN v64.85,18.55 | K.IN v57.2,18.55 | J.IN v50.1,18.55 | H.IN v42.65,18.55 | G.IN v35.35,18.55 | F.IN v27.8,18.55 | D.IN v20.45,18.55 | S.IN v13.05,18.55 | A.IN v5.35,18.55
  Bottom 0.254: v13.05,18.55 v20.45,18.55 v27.8,18.55 v35.35,18.55 v42.65,18.55 v50.1,18.55 v57.2,18.55 v64.85,18.55 v72.05,18.55 v79.4,18.55 79.65,18.55 81.42,20.32 81.9,20.8 82.1,21 82.1,30.1 80.35,31.85 78.75,31.85 77.5,33.1 77.28,33.1 U$7.33
  Bottom 0.61: v5.35,18.55 v79.4,18.55
D/C  (via drill 0.9)
  Top 0.61: v50.92,39.83 51.15,40.05 U$11.P$22
  Bottom 0.254: X5.37 45.6,63
  Bottom 0.406: 45.6,63 48.83,63 50.62,61.2 50.65,50.8 47.35,47.5 47.33,40.8 48.15,39.83 v50.92,39.83
DE
  Bottom 0.254: X5.13 45.23,75 46.12,75 48.08,75 53.08,80 53.08,81.95 55.85,84.72 57,84.72 57.95,85.67 R17.2
DISPLAY_RESET  (1 unrouted)
  Bottom 0.254: 33.35,44.57 U$11.P$35 | R13.1 50.58,85.08 50.58,81.35 46.23,77 X5.9
FB
  Bottom 0.406: C20.2 103.15,72.58 R37.2
  Bottom 0.61: 103.5,74.42 R36.1 | R36.1 103.1,74.67 | U$2.2 103.5,73.53 | 103.5,72.97 103.45,72.88 C20.2 103.5,72.97 | 103.5,72.97 103.5,73.53 | 103.5,73.53 103.5,74.28 R36.1
FM_RST  (2 unrouted)
GND  (via drill 0.6, 0.9)  (10 unrouted)
  Bottom 0.254: 75.42,28.57 U$7.THERMAL 75.42,29.83 U$7.VIA4 | GND.TP 33.88,84.97 33.8,83.92 | 44,65.5 45.73,65.5 45.9,65.67 45.9,66 | U$9.5_0V 75.3,92.45 U$9.P$7 | U$8.14 35.1,89.95 | 35.1,89.95 35.5,89.95 | 35.1,89.95 35.1,89.7 U$8.P$1 34.25,88.95 U$8.12 33.6,88.95 | U$8.13 35,89.45 35.5,89.95 | 37.4,90.4 37.4,89.95 U$8.3 35.5,89.95 | U$7.37 76.66,29.65 | 76.66,29.65 U$7.VIA3 | 76.66,29.65 U$7.4 78.69,27.62 79.12,27.62 79.9,28.4 79.9,28.57 79.36,29.12 U$7.1 | 76.66,29.65 | X5.50 44.05,53.5 v46.65,57.33 | 28.82,50.33 28.62,50.12 27.52,50.12 27.25,49.85 27.25,48.17 27.68,47.75 | X5.1 44.05,83.65 v41.58,83.83 | U$1.16 72.25,85.12 | 72.25,85.12 71.97,85.12 v71.97,85.67 U$1.GND | U$1.1 72.25,82.12 72.25,85.12 | 45.9,70 49.5,70 v49.67,70.17 | U$6.14 35.4,64.62 35.48,64.7 | U$6.16 36.7,64.97 36.73,65 | U$6.6 33.45,57.23 32.77,56.55
  Bottom 0.305: 41.8,74 41.75,74.5 X5.14 45.95,74.5 45.9,74 | 41.8,74 41.8,73.5 | 41.8,73.5 41.8,73 | 41.8,73 41.8,72.5 | 41.8,72.5 41.8,72 | 41.8,72 41.8,71.5 | 41.8,71.5 41.8,71 | 41.8,71 41.8,70.5 | 41.8,70.5 41.8,70 | 41.8,70 41.8,69.5 | 41.8,68.5 41.8,68 | 41.8,68 41.8,67.5 | 41.8,67.5 41.8,67 | 41.8,67 41.8,66.5 | 41.8,66.5 41.8,66 | 41.8,66 42.33,65.5 44,65.5 X5.32 | 41.8,66 X5.31 45.9,66 45.9,66.5 | 41.8,66.5 X5.30 45.9,66.5 | 41.8,67 X5.29 45.9,67 | 41.8,67.5 X5.28 45.9,67.5 | 41.8,68 X5.27 45.9,68 | 41.8,68.5 X5.26 45.9,68.5 | 41.8,69.5 X5.24 45.9,69.5 | 41.8,69.5 41.8,69 | 41.8,69 X5.25 45.9,69 | 41.8,69 41.8,68.5 | 41.8,70 X5.23 45.9,70 | 41.8,70.5 X5.22 45.9,70.5 | 41.8,71 X5.21 45.9,71 | 41.8,71.5 X5.20 45.9,71.5 | 41.8,72 X5.19 45.9,72 | 41.8,72.5 X5.18 45.9,72.5 | 41.8,73 X5.17 45.9,73 | 41.8,74 X5.15 45.9,74 | 41.8,73.5 X5.16 45.9,73.5 | 45.9,74 45.9,73.5 | 45.9,73.5 45.9,73 | 45.9,73 45.9,72.5 | 45.9,72.5 45.9,72 | 45.9,72 45.9,71.5 | 45.9,71.5 45.9,71 | 45.9,71 45.9,70.5 | 45.9,70.5 45.9,70 | 45.9,70 45.9,69.5 | 45.9,69.5 45.9,69 | 45.9,69 45.9,68.5 | 45.9,68.5 45.9,68 | 45.9,68 45.9,67.5 | 45.9,67.5 45.9,67 | 45.9,67 45.9,66.5
  Bottom 0.406: 96.2,59.12 U$10.2 | R38.1 102.5,66.38 | C10.1 78.55,88.9 v78.75,89.1 79.45,89.8 R8.2 | U$3.2 96.4,66.97 96.5,67.08
  Bottom 0.61: C5.2 75.75,90.38 76.38,91 76.38,92.42 U$9.P$7
  Bottom 1.27: 71.95,82.45 71.95,81.45
  other vias: 71.97,83.58 71.97,86.75 71.97,82.47 79.4,42.5 71.15,53.17 26.27,40.1 41.55,37.73 67.47,39.08 62.73,87.83
  pour Bottom (isolate 0.406, rank 6): 0,39 0,3 arc90 3,0 82,0 arc90 84.92,3.1 84.92,92.7 arc90 81.6,96 21.41,96.2 arc90 20.5,95.04 20.5,40 1,40 arc90
  pour Top (isolate 0.38, rank 6): 0,39 0,3 arc90 3,0 82,0 arc90 85.12,3.23 85.12,92.83 arc90 81.6,96 21.5,96 arc90 20.5,95 20.5,40 1,40 arc90
H_SYNC
  Bottom 0.254: R15.1 51.7,83.8 51.7,80.55 47.15,76 X5.11
HVOUT
  Bottom 0.254: U$1.18 78.62,84.12 C15.2
  pour Bottom (isolate 0.406, rank 2, no thermals): 73.22,84.17 77.38,84.15 79.38,84.15 79.38,86.28 80.78,86.33 80.78,83 80.17,82.4 80.12,79.97 82,79.85 81.97,77.35 77.62,77.3 77.65,81.78 76.15,81.78 76.12,81.8 76.15,83.6 73.2,83.6
HVPR  (via drill 0.9)
  Top 0.61: v83.25,84.22 80.2,87.28 78.17,87.28 74.47,90.97 70.47,90.97 67.83,88.3 v67.83,85.8
  Bottom 0.254: U$1.7 68.92,85.12 68.9,85.2
  Bottom 0.406: T2.B 82.8,84.67 v83.25,84.22 | R27.1 67.22,85.92 v67.83,85.8 68.05,85.2 68.9,85.2
  pour Bottom (isolate 0.406, no thermals): 70.58,84.2 70.58,87.33 66.8,87.35 66.8,84.22
ID_SC  (via drill 0.9)
  Top 0.406: U$11.P$28 43.53,37.77 44.45,36.85 48,36.85 48.85,37.7 52.55,37.7 53.6,38.75 v53.6,39.5
  Bottom 0.406: R4.1 59.84,50.29 IC2.6 64.12,50.3 65.1,49.33 65.1,47.38 64.47,46.75 63.2,46.75 62.58,46.12 62.58,40.25 62.12,39.8 53.9,39.8 v53.6,39.5
ID_SD  (via drill 0.9)
  Top 0.61: U$11.P$27 43.53,46.16 45.8,48.42 59.42,48.42 v60.05,48.02
  Bottom 0.406: IC2.5 60.1,49.02 | 60.1,49.02 58.03,49.02 | 58.03,49.02 58.02,49.02 57.73,49.32 | 58.03,49.02 57.3,49.7 57.33,50.65 R5.1 | v60.05,48.02 60.08,48.99 60.1,49.02
IN  (via drill 0.9)
  Top 0.61: 73.6,88.62 v73.7,88.62 74,88.62 v76.9,85.72
  Bottom 0.254: U$1.15 76.75,85.62 v76.9,85.72 | v73.7,88.62 73.53,88.75 | U$1.12 73.42,87.45
  Bottom 0.813: 73.42,87.45 73.42,88.35 v73.7,88.62
  pour Bottom (isolate 0.254, rank 2, no thermals): 72.33,92.85 72.3,90.88 73.05,90.17 73.08,87.12 74.12,87.12 74.42,87.78 74.42,92.58 73.6,92.85
IN_1
  Bottom 0.61: U$3.1 99,68.03 C21.2
INT  (via drill 0.9)  (1 unrouted)
  Top 0.406: U$11.P$7 v68.93,46.55 68.93,47.77 67.33,49.45 | v53.67,35.65 v53.7,22.55
  Bottom 0.254: 68.95,44.57 U$11.P$7 | 73.8,25.5 74,25.57 U$7.12
  Bottom 0.406: 73.8,25.5 73.53,25.23 73.53,24.43 72.7,23.75 54.9,23.75 v53.7,22.55 | U$5.7 71.19,51.66 70.62,51.1 70.62,47.77 69.4,46.55 v68.93,46.55 66,46.55 65.12,45.67 65.12,39.05 64.2,38.12 55.4,38.12 53.67,36.4 v53.67,35.65
LEDK1
  Bottom 0.305: X5.44 40.7,59.5 R18.2
LEDK2
  Bottom 0.305: X5.45 40.92,59 R19.2
LEDK3
  Bottom 0.305: X5.46 41.98,58.5 41.15,57.67 41.15,56.9 40.42,56.17 R20.2
LEDK4
  Bottom 0.305: X5.47 42.4,58 41.8,57.4 41.8,55.75 40.98,54.92 39.85,54.92 R21.2
LEDK5
  Bottom 0.254: 40.7,54 R22.2
  Bottom 0.305: X5.48 42.75,57.5 42.38,57.12 42.38,55.48 R22.2
LEDK6
  Bottom 0.305: X5.49 43.2,57 43,56.8 43,54.1 R23.2
LX
  Bottom 0.61: U$2.5 96.2,74.47 L1.2 96.35,76.22 D1.A
MISO  (via drill 0.9)
  Top 0.406: v54.73,46.62 53.98,47.38 51.85,47.38 51.15,46.67 U$11.P$21
  Bottom 0.254: X5.33 45.95,65 46.38,65.35
  Bottom 0.406: 46.38,65.35 49.8,65.35 53.1,62.02 53.27,61.85 53.27,48.52 54.73,47.08 v54.73,46.62
MOSI  (via drill 0.9)
  Top 0.61: U$11.P$19 52.69,45.55 arc-45 52.6,45.77 v52.6,46.12
  Bottom 0.254: X5.34 46.42,64.5
  Bottom 0.406: 46.42,64.5 49.5,64.5 52.42,61.58 52.4,46.45 v52.6,46.12
N$1
  Bottom 0.254: U$8.17 34.25,93.7 33.05,94.9 26.48,94.9 Q2.4 C24.2
N$3
  Bottom 0.254: U$1.9 69.83,86.12 69.33,86.62 69.33,87.2 69.22,87.3 68.03,87.3 R9.1
N$4
  Bottom 0.254: U$1.3 69.9,83.12 69.67,82.9 R10.1
N$5
  Bottom 0.254: U$1.14 75.55,86.12 76.25,86.83 79.88,86.83 80.3,87.28 R8.1
N$6
  Bottom 0.254: U$1.4 69.47,83.62 69.1,83.25 69.1,80.62 67.97,79.5 R7.1
N$7
  Bottom 0.254: U$1.17 78.15,84.62 78.55,85.03 C10.2
N$8
  Bottom 0.406: C11.2 67.55,77.9 R7.2
N$11
  Bottom 0.406: Q3.1 80.44,52.93 U$5.1
N$12
  Bottom 0.61: Q1.2 44.8,51.4 43.95,52.25 R23.1 R22.1 R21.1 37.9,52.25 37.62,52.67 37.62,55.4 R20.1 R19.1 R18.1
N$13
  Bottom 0.406: U$5.2 81.23,51.66 81.97,52.4 81.97,57.95 Q3.4
N$16
  Bottom 0.61: C21.1 101.15,68.03 R38.2 D4.A
N$19
  Bottom 0.254: U$8.9 34.75,87.45 34.4,87.1 32,87.1 30.6,88.5 29.2,88.5 27.82,89.88 | 27.82,89.88 Q2.1 | C8.1 22.57,89.88 27.82,89.88
N$20
  Bottom 0.61: Q1.1 R24.1
N$21
  Bottom 0.254: U$1.6 68.6,84.62 68.08,84.08
  Bottom 0.406: 68.08,84.08 67.2,84.08 66.75,83.65 66.75,81.9 67.4,81.3 R26.1
N$22
  Bottom 0.254: C25.2 30.03,90.97 U$8.16
N$23
  Bottom 0.254: C26.2 31.15,90.45 U$8.15
N$25
  Bottom 0.254: U$8.4 37.95,89.45 38.05,89.55
  Bottom 0.305: 38.05,89.55 39.25,90.75 39.25,91.28
  Bottom 0.61: 39.25,91.28 39.25,91.75 39.4,91.6 39.55,91.6 | 39.55,91.6 L3.2 | TP1.TP 39.55,91.6
N$26
  Bottom 0.254: U$8.6 36.27,85.25 R29.2
N$27
  Bottom 0.254: U$1.5 69.05,84.12 R26.2
N$33
  Bottom 0.254: U$1.10 70.05,86.62 69.83,86.85 69.83,87.58 Q4.1 69.55,87.95
OUT1_IN2
  Bottom 0.406: U$3.3 96.55,64.78 U$10.1
OUT2
  Bottom 0.254: 98.7,60.02 98.7,59.42 C23.2
  Bottom 0.305: U$10.3 98.7,60.02
P_CLK
  Bottom 0.254: R16.2 52.38,82.4 52.38,80.28 47.6,75.5 X5.12
PWM  (via drill 0.9)
  Top 0.61: U$11.P$29 v41,46.98
  Bottom 0.406: v41,46.98 41,48.1 R24.2
  Bottom 0.61: 40.99,48.11 R24.2 R25.2
RANDOM  (via drill 0.9)  (1 unrouted)
  Top 0.406: v36.02,39.5 38.05,39.5 38.45,39.9 U$11.P$32
  Bottom 0.305: C23.1 95.82,58.06
  Bottom 0.406: 22.7,40.12 24.75,38.08 34.6,38.08 v36.02,39.5
ROW0  (via drill 0.9)
  Top 0.254: 6.85,10.35 arc90 7.4,10.9 7.4,11.65 arc90 Z.OUT Z.OUT arc-90 5.4,13.64 | 8.2,6.75 9.12,6.75 SHILFT-LEFT.OUT | 1.OUT 1.OUT arc90 3.5,33.6 arc90 5.45,31.65 7.55,31.65 v7.6,31.6 | 5.45,27.3 arc-90 Q.OUT 5.34,27.29 arc90 3.45,25.4 3.45,25.3 arc90 5.4,23.35 | 5.4,20.48 arc90 A.OUT 5.3,20.45 arc90 3.4,18.55 3.4,18.4 arc90 5.4,16.4
  Top 0.61: 5.45,31.65 5.43,31.64 Q.OUT | 5.4,23.35 5.43,23.32 A.OUT | 5.4,16.4 5.43,16.36 Z.OUT | 8.2,6.75 6.85,8.1 6.85,10.35
  Bottom 0.254: U$7.15 72.9,26.6 12.6,26.6 v7.6,31.6
ROW1  (via drill 0.9)
  Top 0.254: 2.OUT 12.73,35.53 arc90 10.85,33.65 10.85,33.55 arc90 12.85,31.55 14.75,31.55 v14.85,31.45 | W.OUT arc90 W.OUT 12.74,27.29 arc90 10.85,25.4 10.85,25.35 arc90 12.9,23.3 | 12.9,20.5 arc-90 S.OUT 12.75,20.45 arc90 10.85,18.55 10.85,18.45 arc90 12.85,16.45 | X.OUT arc90 X.OUT
  Top 0.61: 12.9,23.3 12.86,23.25 S.OUT | 12.85,31.55 12.86,31.55 W.OUT | 12.85,16.45 12.86,16.45 X.OUT
  Bottom 0.254: U$7.16 72.65,27.05 19.25,27.05 v14.85,31.45
ROW2  (via drill 0.9)
  Top 0.254: 20.25,9.65 arc90 22.2,11.6 22.2,11.75 arc90 20.34,13.61 C.OUT arc90 20.3,13.64 | 20.3,16.55 arc-90 18.3,18.55 arc-90 20.2,20.45 D.OUT arc-90 20.25,20.46 | 20.25,23.3 arc-90 18.25,25.3 18.25,25.4 arc-90 20.14,27.29 E.OUT arc-90 20.25,27.3 | 3.OUT 20.18,35.53 arc90 18.3,33.65 18.3,33.5 arc90 20.25,31.55 v22.45,31.55
  Top 0.61: 20.25,31.55 20.27,31.54 E.OUT | 20.25,23.3 20.27,23.29 D.OUT | 20.3,16.55 20.27,16.52 C.OUT | SPACE1.OUT 20.25,8.02 20.25,9.65
  Bottom 0.254: U$7.17 72.39,27.5 26.5,27.5 v22.45,31.55
ROW3  (via drill 0.9)
  Top 0.254: 4.OUT 27.53,35.53 arc90 25.65,33.65 arc90 27.7,31.6 27.7,31.35 27.95,31.6 v29.85,31.6 | 27.7,27.32 arc-90 R.OUT 27.59,27.29 arc90 25.7,25.4 25.7,25.2 arc90 27.65,23.25 | 27.65,20.48 arc90 F.OUT 27.6,20.45 arc90 25.7,18.55 25.7,18.45 arc90 27.65,16.5 | 27.65,13.63 arc90 V.OUT 27.79,13.61 arc-90 29.7,11.7 29.7,11.05 arc-90 29,10.35 | 30.55,6.75 31.36,6.75 SPACE2.OUT
  Top 0.61: 27.7,31.35 27.68,31.32 R.OUT | 27.65,16.5 27.68,16.48 V.OUT | 27.65,23.25 27.68,23.23 F.OUT | 30.55,6.75 29,8.3 29,10.35
  Bottom 0.254: U$7.18 72.13,27.95 33.5,27.95 v29.85,31.6
ROW4  (via drill 0.9)
  Top 0.254: 35.2,16.5 arc-90 33.25,18.45 33.25,18.55 arc-90 35.15,20.45 G.OUT arc90 G.OUT | B.OUT arc-90 B.OUT | 35.2,23.35 arc-90 33.3,25.25 33.3,25.4 arc-90 T.OUT T.OUT arc90 T.OUT | 5.OUT 35.03,35.53 arc90 33.15,33.65 33.15,33.55 arc90 35.2,31.5 35.35,31.65 v37.3,31.65
  Top 0.61: 35.2,31.5 T.OUT | 35.2,23.35 35.2,23.34 G.OUT | 35.2,16.5 B.OUT
  Bottom 0.254: U$7.19 71.88,28.4 40.55,28.4 v37.3,31.65
ROW5  (via drill 0.9)
  Top 0.254: 6.OUT 42.48,35.53 arc90 40.55,33.6 40.55,33.45 arc90 42.5,31.5 42.6,31.6 v44.75,31.6 | Y.OUT arc90 Y.OUT 42.49,27.29 arc90 40.6,25.4 40.6,25.3 arc90 42.5,23.4 | H.OUT arc90 H.OUT 42.4,20.45 arc90 40.45,18.5 40.45,18.45 arc90 42.5,16.4 | N.OUT arc90 N.OUT 42.41,13.61 arc90 40.5,11.7 40.5,11.2 arc90 41.75,9.95
  Top 0.61: 42.5,31.5 42.51,31.5 Y.OUT | 42.5,23.4 42.51,23.39 H.OUT | 42.5,16.4 42.51,16.39 N.OUT | SPACE3.OUT 41.27,9.46 41.75,9.95
  Bottom 0.254: U$7.20 71.62,28.85 47.5,28.85 v44.75,31.6
ROW6  (via drill 0.9)
  Top 0.254: 51.35,10.25 arc90 52,10.9 52,11.7 arc90 50.09,13.61 M.OUT arc-90 49.95,13.62 | 52.65,6.75 53.6,6.75 SHIFT-RIGHT.OUT | 49.95,16.5 arc-90 47.9,18.55 47.9,18.6 arc-90 49.75,20.45 J.OUT arc-90 49.95,20.46 | 49.95,23.4 arc-90 48,25.35 48,25.4 arc-90 49.89,27.29 U.OUT arc90 50,27.32 | 7.OUT 49.93,35.53 arc90 48,33.6 48,33.5 arc90 50,31.5 50.45,31.95 v51.38,31
  Top 0.61: 50,31.5 49.97,31.46 U.OUT | 49.95,23.4 49.97,23.39 J.OUT | 49.95,16.5 49.97,16.48 M.OUT | 52.65,6.75 51.35,8.05 51.35,10.25
  Bottom 0.254: U$7.21 71.12,30.95 51.88,31 v51.38,31
ROW7  (via drill 0.9)
  Top 0.254: 8.OUT 57.23,35.53 arc90 55.3,33.6 55.3,33.5 arc90 57.3,31.5 57.8,31.5 58.4,32.1 v59.1,32.1 | 57.3,27.32 arc90 I.OUT 57.19,27.29 arc90 55.3,25.4 arc90 57.35,23.35 | 57.35,20.48 arc-90 K.OUT 57.3,20.45 arc90 55.4,18.55 55.4,18.35 arc90 57.3,16.45 | 57.3,13.63 arc90 ?.OUT
  Top 0.61: 57.3,31.5 57.33,31.48 I.OUT | 57.35,23.35 57.33,23.32 K.OUT | 57.3,13.63 57.3,16.45
  Bottom 0.254: U$7.22 71.33,31.45 59.6,31.45 v59.1,32.1
ROW8  (via drill 0.9)
  Top 0.254: 64.75,9.65 arc-90 62.7,11.7 arc-90 64.61,13.61 !.OUT arc-90 64.7,13.64 | 64.75,6.79 arc-90 @.OUT | 64.7,16.5 arc-90 62.75,18.45 62.75,18.55 arc-90 64.65,20.45 L.OUT arc90 64.75,20.46 | 64.75,23.25 arc-90 62.7,25.3 62.7,25.35 arc-90 64.64,27.29 O.OUT arc90 64.75,27.3 | 9.OUT 64.63,35.53 arc90 62.7,33.6 62.7,33.55 arc90 64.75,31.5 65.35,31.5 65.95,32.3 v66.35,32.7
  Top 0.61: 64.7,16.5 64.73,16.46 !.OUT | 64.75,23.25 64.73,23.23 L.OUT | 64.75,31.5 64.73,31.48 O.OUT | 64.75,6.79 64.75,9.65
  Bottom 0.254: U$7.23 71.53,31.95 67.1,31.95 v66.35,32.7
ROW9  (via drill 0.9)
  Top 0.254: 72.2,16.5 arc-90 70.2,18.5 70.2,18.55 arc-90 72.1,20.45 (.OUT arc-90 (.OUT | 72.2,13.65 arc-90 ,.OUT 72.34,13.61 arc-90 74.2,11.75 74.2,11.05 arc-90 73.45,10.3 | 0.OUT 71.88,35.53 arc90 70.1,33.75 | 70.1,33.75 arc90 72.2,31.65 | 72.2,27.34 arc-90 P.OUT 72.04,27.29 arc90 70.15,25.4 70.15,25.35 arc90 72.15,23.35 72.16,23.34 | 75,6.8 75.83,6.8 FN-RIGHT.OUT | v70.4,33.12 70.5,33.2 70.15,33.2 70.1,33.25 70.1,33.75
  Top 0.61: 72.2,31.65 72.16,31.61 P.OUT | 72.16,23.34 (.OUT | 72.2,16.5 72.16,16.45 ,.OUT | 75,6.8 73.45,8.35 73.45,10.3
  Bottom 0.254: U$7.24 71.41,32.8 70.72,32.8 v70.4,33.12
ROW10  (via drill 0.9)
  Top 0.254: 79.55,27.3 arc90 +.OUT | +.OUT 79.49,27.29 arc90 77.6,25.4 77.6,25.35 arc90 79.6,23.35 | 79.6,20.48 arc-90 ).OUT ).OUT arc90 77.65,18.55 77.65,18.5 arc90 79.55,16.6 | 79.55,13.62 arc90 ..OUT | 79.27,35.53 -.OUT 79.48,35.53 arc90 77.6,33.65 77.6,33.55 arc90 79.55,31.6 78.75,31.6 | 78.75,27.29 +.OUT
  Top 0.406: v79.9,37.98 79.56,37.64 -.OUT
  Top 0.61: 79.6,20.48 79.6,23.35 | 79.55,13.62 79.55,16.6 | 78.75,27.29 +.OUT 79.55,31.6
  Bottom 0.254: U$7.25 72.65,32.25
  Bottom 0.406: 72.65,32.25 72.65,32.5 73.33,33.17 73.33,36.62 75.42,38.73 79.15,38.73 v79.9,37.98
SCK  (via drill 0.9)
  Top 0.406: v49.12,46.62 48.61,46.11 U$11.P$23
  Bottom 0.254: X5.36 45.15,63.5 45.33,63.67
  Bottom 0.406: 45.33,63.67 49.3,63.67 51.48,61.5 51.48,48.7 49.42,46.62 v49.12,46.62
SCL_3V3  (via drill 0.9)  (1 unrouted)
  Top 0.406: U$11.P$5 71.47,47.78 | 71.47,47.78 68.72,50.61 | 68.72,50.61 68.67,50.65 | v61.08,36.17 v61.08,22.18 | 68.17,51.15 68.72,50.61 | 71.47,47.78 71.47,49.57 v71.96,50.09
  Bottom 0.254: 71.45,44.57 U$11.P$5 | 35.8,82.67 35.8,66.35 34.15,64.47 U$6.12 | 35.8,82.67 35.8,87.95 35.75,88 U$8.7 | 74.72,25.48 74.72,25.59 U$7.11 | R6.1 36.1,82.38 35.8,82.67
  Bottom 0.406: 74.72,25.48 74.35,25.1 74.35,23.93 73.2,22.77 61.67,22.77 v61.08,22.18 | v61.08,36.17 61.33,36.42 68.15,36.42 70.2,38.48 70.2,45.75 71.47,47.02 71.47,49.57 v71.96,50.09 71.97,50.08 72.29,50.39 U$5.6 75.96,50.39 76.53,49.85 78.2,48.17 80.38,48.17 81.03,47.52 R1.1
SDA_3V3  (via drill 0.9)  (1 unrouted)
  Top 0.406: v68.4,21.62 68.4,35.58 72.22,39.4 v72.22,39.62 | U$11.P$3 73.92,44.63 73.92,46.85 v73.42,47.35 73.92,47.85 73.92,51.42 72.12,53.23
  Bottom 0.254: 35.25,82.7 35.25,66.6 33.48,64.58 U$6.11 | 35.25,82.7 U$8.8 | 76.38,25.35 76.38,25.69 U$7.10 | R2.1 34.92,82.38 35.25,82.7
  Bottom 0.406: 76.38,25.35 76.38,24.35 73.65,21.62 v68.4,21.62 | 73.95,44.61 U$11.P$3 | U$5.5 74.01,48.48 74.01,47.08 | 74.01,47.08 74,47.06 R3.1 72.75,45.75 72.75,40.15 v72.22,39.62 | 74.01,47.08 73.7,47.08 v73.42,47.35
STEPUP_ENABLE  (via drill 0.9)  (1 unrouted)
  Top 0.61: v37.02,46.85 37.62,46.85 38.45,46.02 U$11.P$31
  Bottom 0.406: 21.82,39.58 24.3,37.1 38.67,37.1 39.66,38.08 arc45 39.75,38.31 39.75,45.54 arc45 39.66,45.77 39.02,46.4 37.56,46.4 arc-45 37.38,46.49 v37.02,46.85 | 94.55,78.75 97.67,78.75 101.35,75.08 U$2.1
SW
  Bottom 0.254: U$1.20 74.12,83.12 74.38,82.65
  pour Bottom (isolate 0.305, no thermals): 77.5,77.38 77.5,81.5 76.25,81.5 76.15,81.67 76.03,81.78 75.03,81.78 75,83.2 73.22,83.2 73.28,82 73.28,79.1 75.03,77.38
TOUCH_X+  (via drill 0.9)
  Top 0.406: v39.25,63.85 36.65,61.23 v36.65,59.92
  Bottom 0.254: X5.39 42.83,62 41.88,62.95 40.15,62.95 v39.25,63.85 | C2.2 36.05,55.25 U$6.2 36.05,59.35 v36.65,59.92
TOUCH_X-
  Bottom 0.254: X5.41 42.2,61 41.35,61.85 36.17,61.85 34.75,60.42 U$6.4 34.75,56.8 C18.2
TOUCH_Y+
  Bottom 0.254: X5.42 41.85,60.5 41,61.35 36.5,61.35 35.4,60.25 U$6.3 35.4,56.4 34.17,55.17 C3.2
TOUCH_Y-
  Bottom 0.254: X5.40 42.5,61.5 41.65,62.35 35.9,62.35 34.1,60.55 U$6.5 34.1,56.92 33.02,55.85 31.75,55.85 31.32,55.42 C4.2
V+  (via drill 0.9)
  Top 0.61: U$11.P$17 56.23,45.75 arc-45 56.32,45.97 v57.15,46.8
  Bottom 0.406: U$5.8 73.6,52.92 71.78,54.75 64.04,54.75 IC2.8 59.91,52.83 R4.2 R5.2 56.42,52.38 56.12,52.08 56.12,47.8 v57.15,46.8
V_SYNC
  Bottom 0.254: X5.10 46.7,76.5 51.15,80.95 51.15,85.3 R14.1
VBAT+
  Bottom 0.406: U$5.3 78.44,50.39 77.92,50.9 77.92,53.45 76.75,54.62 73.95,54.62 72.12,56.45 69.22,56.45 U$4.+
VCC  (via drill 0.9)
  Top 0.406: v80.92,29.38 83.22,31.68 83.25,37.85 83.25,41.55 80.25,44.55 U$11.P$1 76.55,46.27 v77.28,47
  Bottom 0.254: U$7.38 79.14,31.43 79.47,31.43 79.66,31.24 | U$7.39 79.66,31.24 | 79.66,31.24 | 79.66,31.24 80.95,29.95 v80.92,29.38
  Bottom 0.406: R3.2 v77.28,47 R1.2

## Text on the board
bNames: TCA8424